# Altium PCB Schematics - Done.PcbDoc
Units mm, origin at the board's own origin, x right, y up, seen from the top; angles counter-clockwise.
Board outline 51 x 43 mm, 2 copper layers (Top Layer, Bottom Layer); 29 components, 26 nets, 122 pads, 23 vias.
Unrouted connection lines stored in the file: 25.
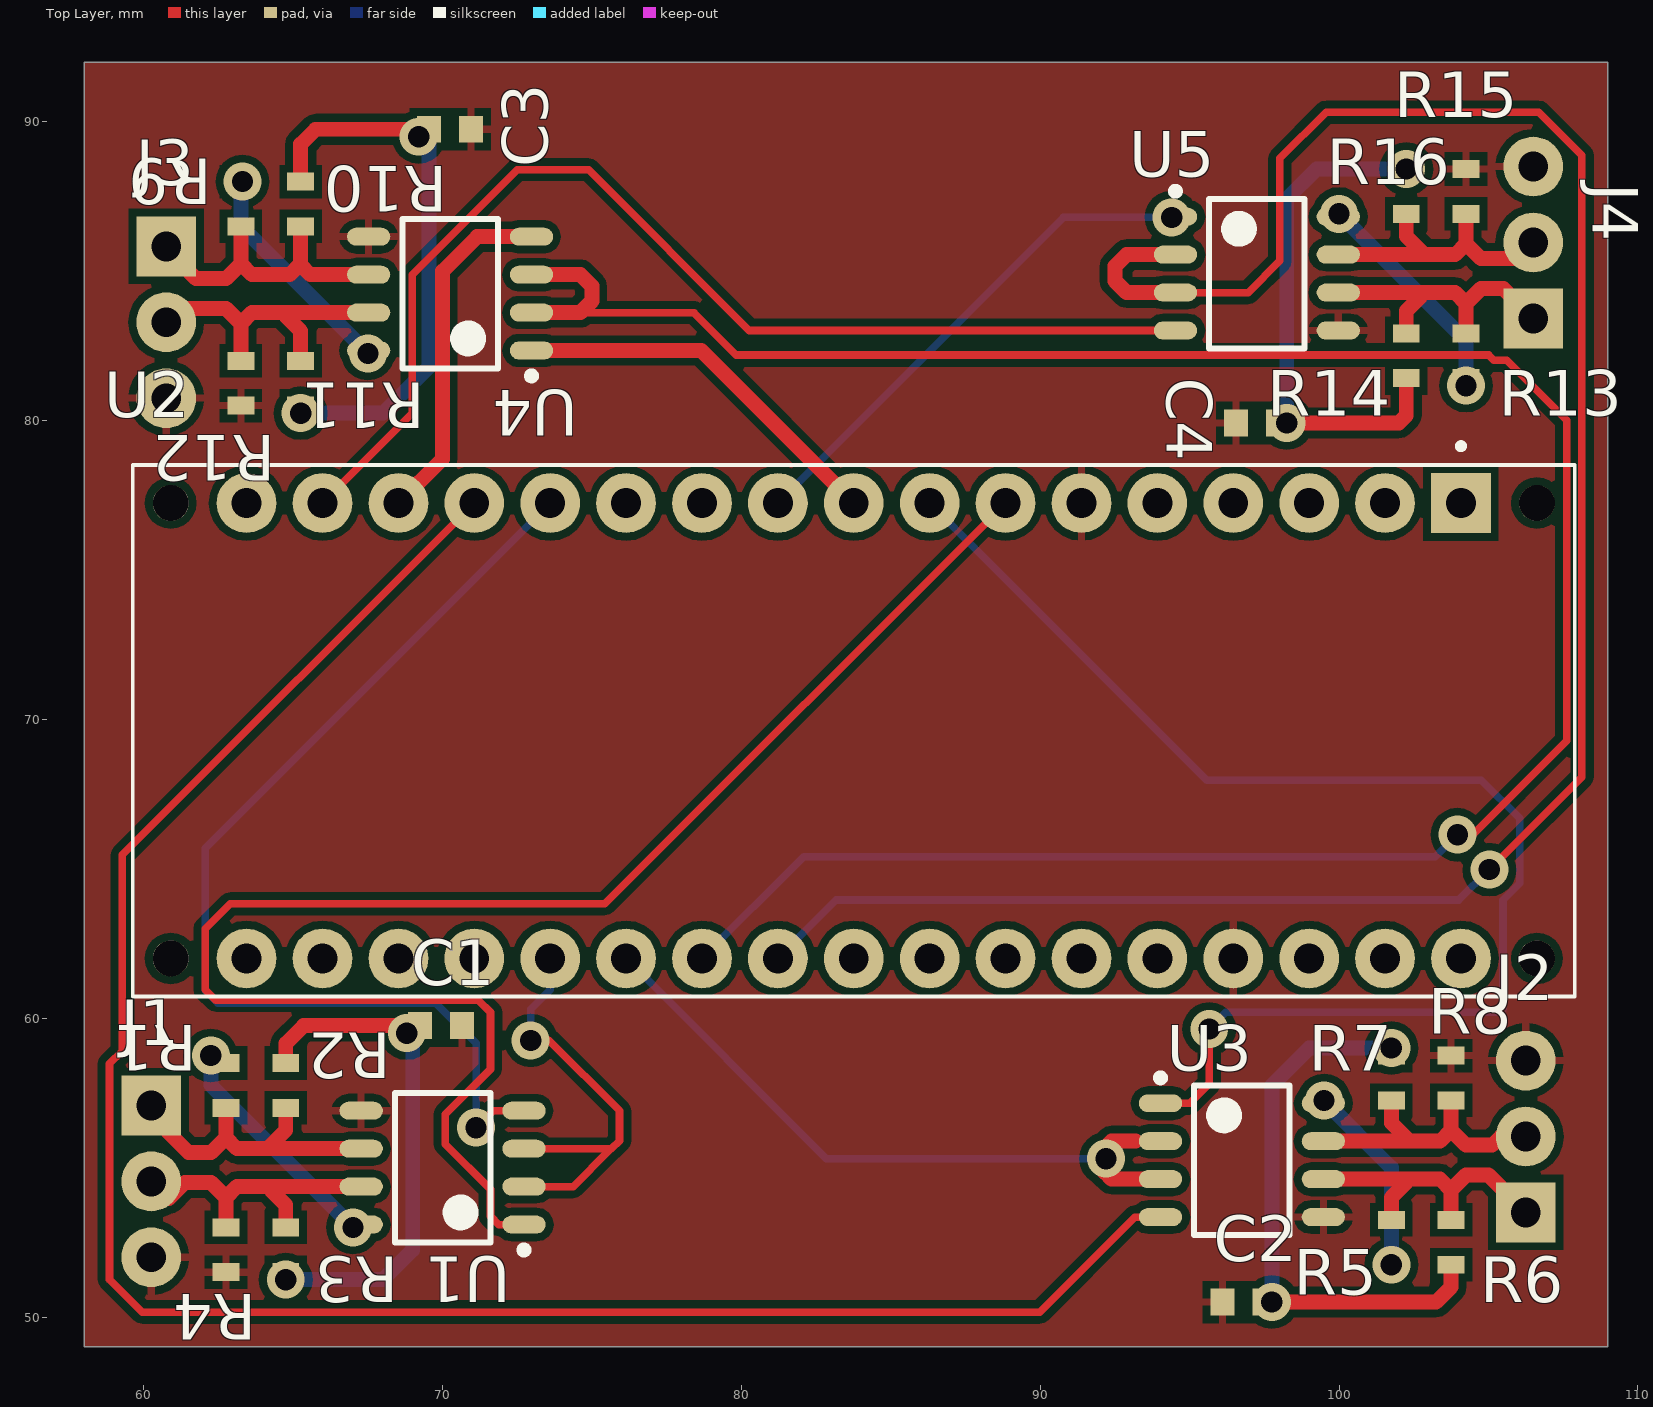
[diagram p0: Top Layer view]
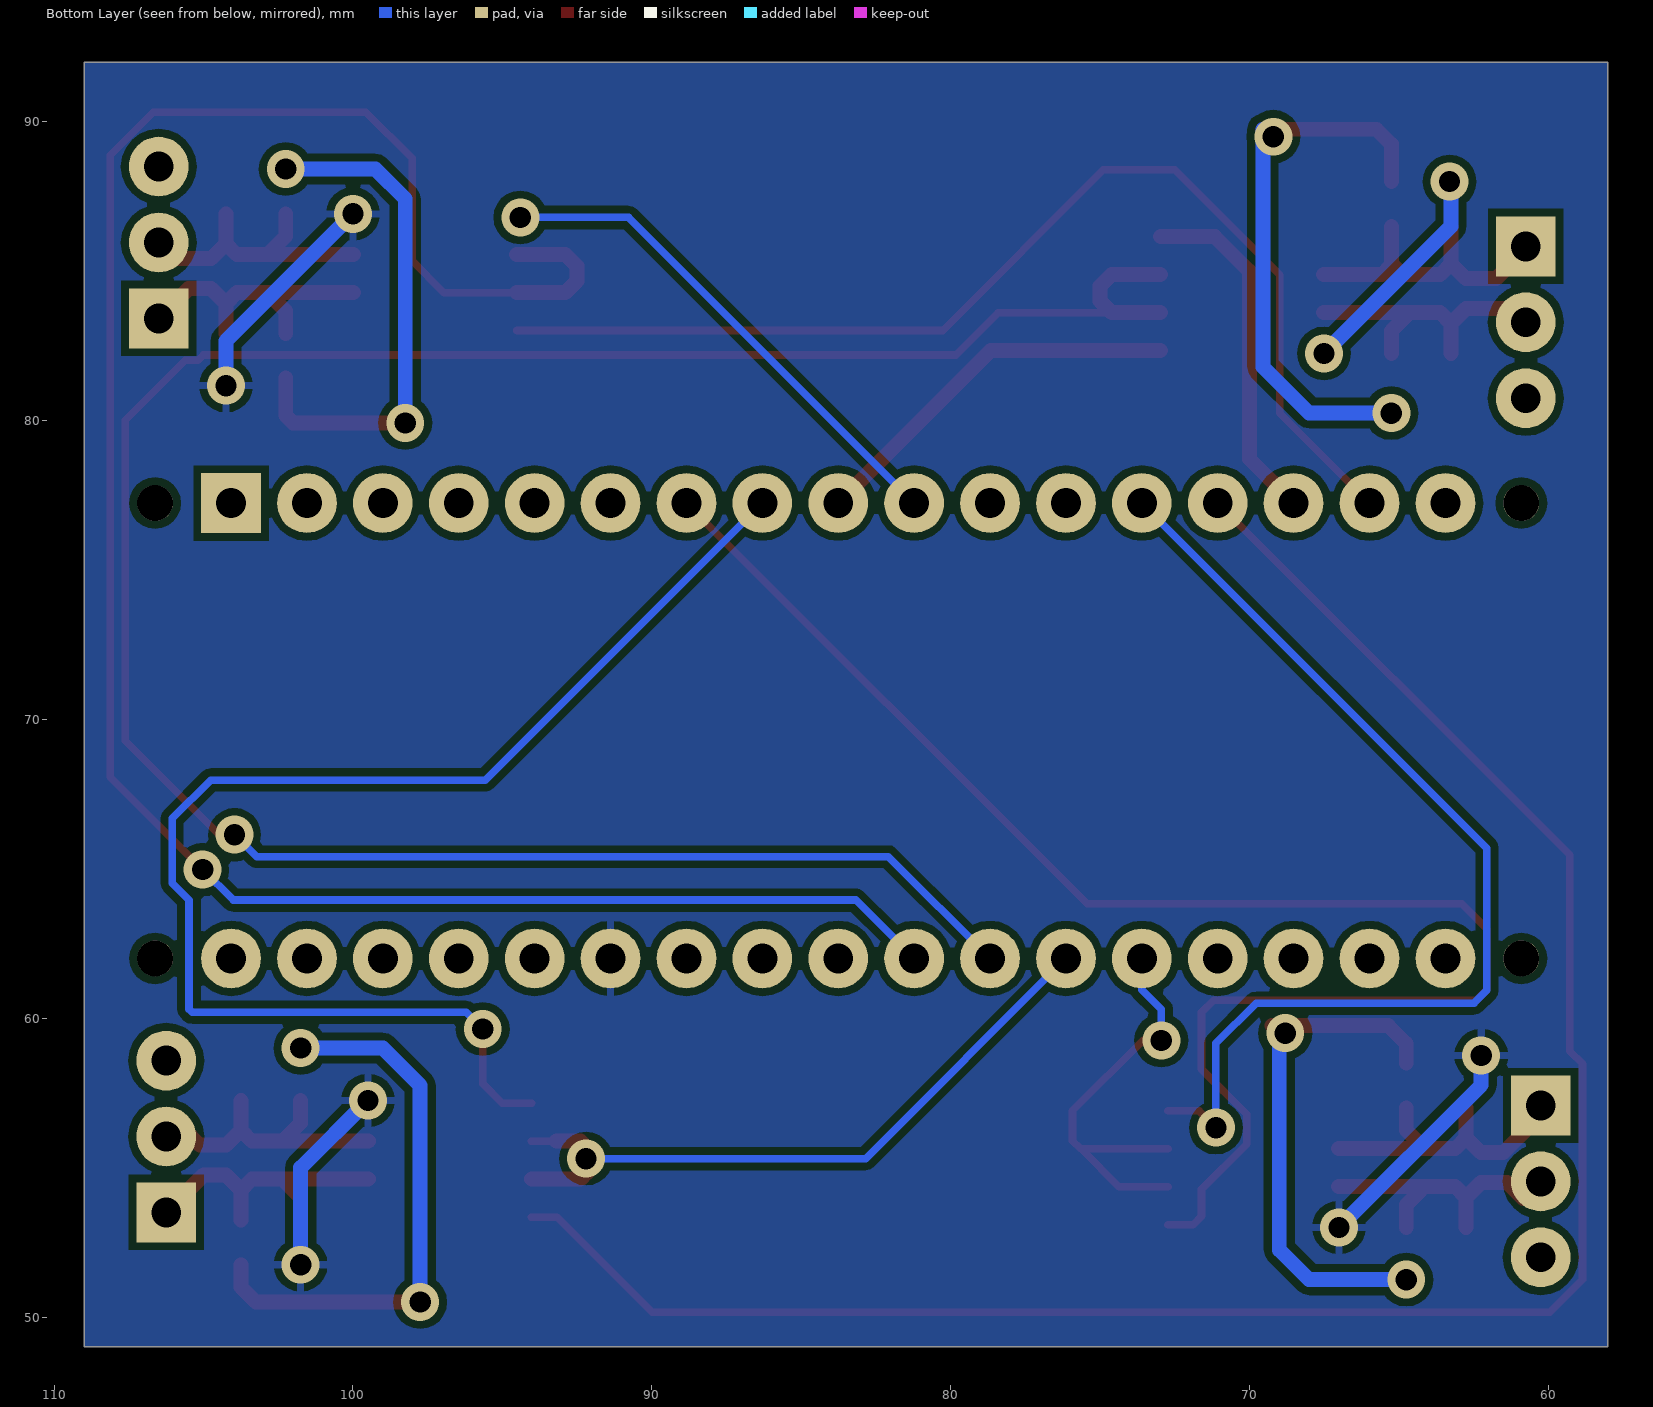
[diagram p1: Bottom Layer view, seen from below]
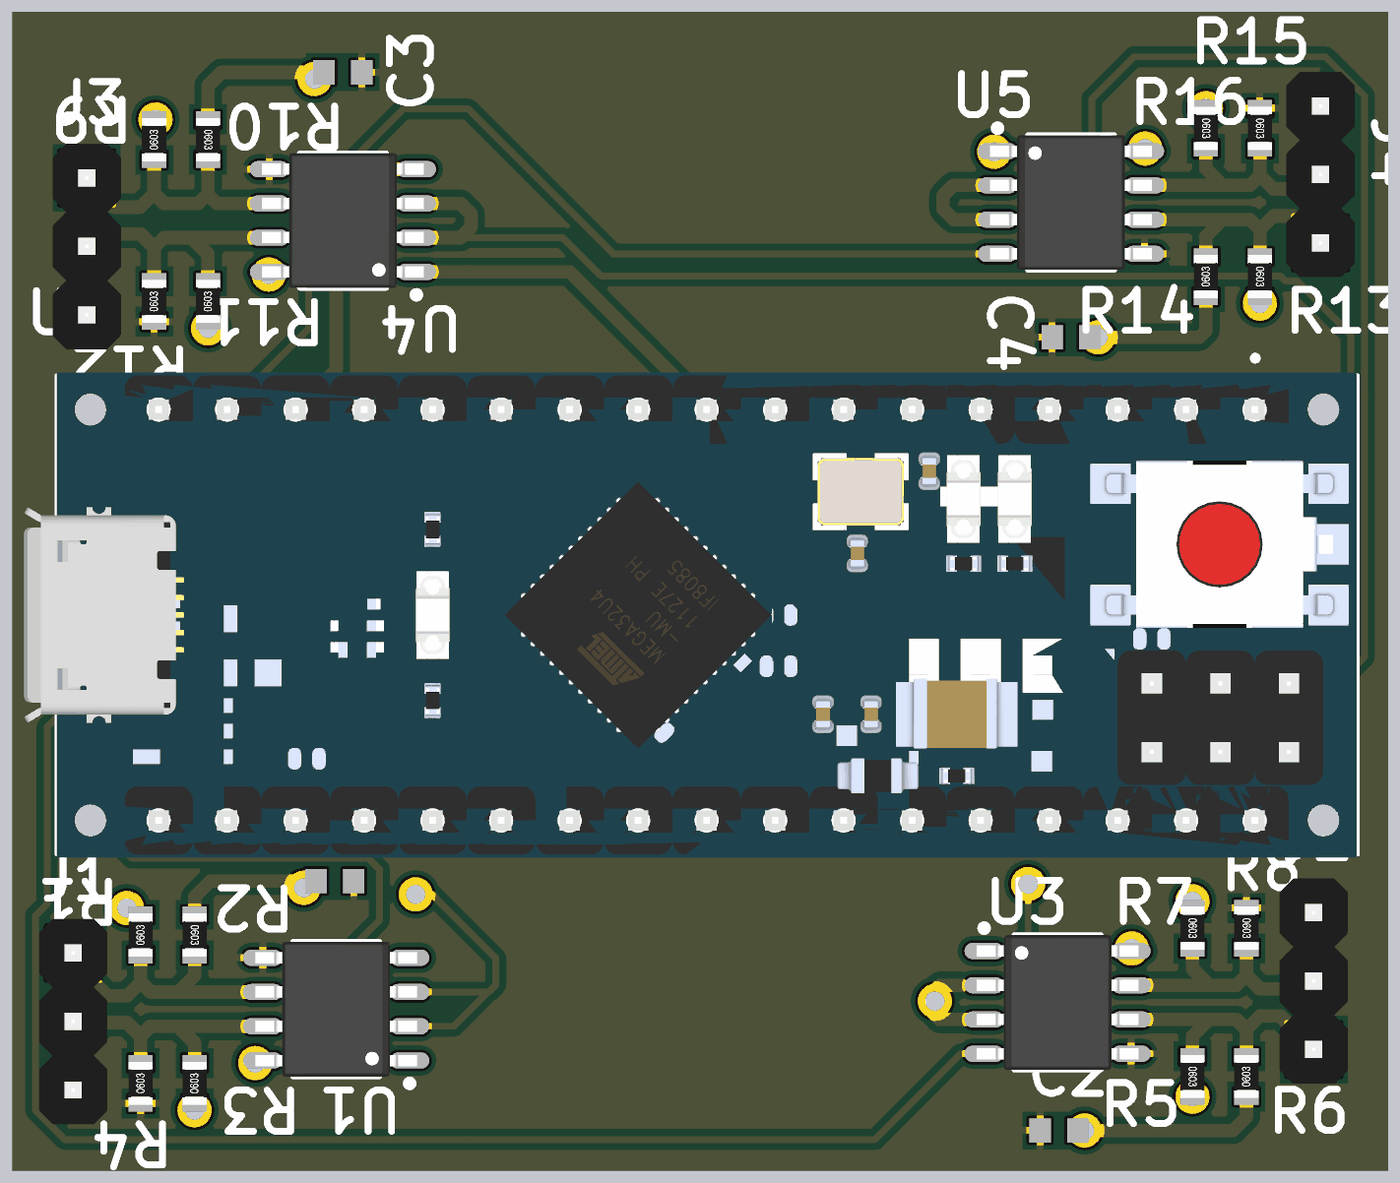
[diagram p2: 3D render of the assembled board from above, using the file's embedded part models]

## Layer stack, top to bottom
Top Solder: solder mask 0.0102, Solder Resist, Dk 3.5
Top Layer: signal copper 0.0356
Dielectric 1: dielectric 0.32, FR-4, Dk 4.8
Bottom Layer: signal copper 0.0356
Bottom Solder: solder mask 0.0102, Solder Resist, Dk 3.5

## Board outline
58,49 109,49 109,92 58,92

## Design rules (kind name [scope] priority, off if disabled: settings)
Clearance [All] p1: gap=0.254 ignorepadtopadclearanceinfootprint=FALSE except(0: Arc-Hole Track-Hole SMDPad-Hole THPad-Hole Via-Hole Fill-Hole Poly-Hole Region-Hole Text-Hole)
PolygonConnect [All] p1: connectstyle=Relief reliefconductorwidth=0.254 reliefentries=4 polygonreliefangle="90 Angle" airgapwidth=0.254
RoutingVias [All] p1: holewidth=0.711 width=1.27 viastyle="Through Hole" minholewidth=0.711 minwidth=1.27 maxholewidth=0.711 maxwidth=1.27
SolderMaskExpansion [All] p1: expansion=0.102 istentingtop=FALSE
Width [All] p1: maxlimit=0.254 minlimit=0.254 preferedwidth=0.254
30 further rules are at their usual default settings.

## Classes and differential pairs
net class "DIFF PAIR DATA": D_N1 D_N2 D_N3 D_N4 D_P1 D_P2 D_P3 D_P4

## Components (designator, comment, footprint, x,y, rotation, side; value= is the part's Value field where it differs from the comment)
C1 "06035C104K4Z2A" 1608[0603] 69.95,59.75 r180 top
C2 "06035C104K4Z2A" 1608[0603] 96.8,50.5 r0 top
C3 "06035C104K4Z2A" 1608[0603] 70.25,89.75 r180 top
C4 "06035C104K4Z2A" 1608[0603] 97.25,79.92 r0 top
J1 "349873-345-34_2" "Header 1x3 male" 60.25,52 r0 top
J2 "349873-345-34_2" "Header 1x3 male" 106.25,58.58 r180 top
J3 "349873-345-34_2" "Header 1x3 male" 60.75,80.75 r0 top
J4 "349873-345-34_2" "Header 1x3 male" 106.5,88.5 r180 top
R1 "CPF-A-0603B100KE1" R0603 62.75,57.75 r90 top value=100K
R2 "CPF-A-0603B100KE1" R0603 64.75,57.75 r270 top value=60R
R3 "CPF-A-0603B100KE1" R0603 64.75,52.25 r90 top value=60R
R4 "CPF-A-0603B100KE1" R0603 62.75,52.25 r90 top value=100K
R5 "CPF-A-0603B100KE1" R0603 101.75,52.5 r270 top value=100K
R6 "CPF-A-0603B100KE1" R0603 103.75,52.5 r90 top value=60R
R7 "CPF-A-0603B100KE1" R0603 101.75,58 r270 top value=60R
R8 "CPF-A-0603B100KE1" R0603 103.75,58 r270 top value=100K
R9 "CPF-A-0603B100KE1" R0603 63.25,87.25 r90 top value=100K
R10 "CPF-A-0603B100KE1" R0603 65.25,87.25 r270 top value=60R
R11 "CPF-A-0603B100KE1" R0603 65.25,81.25 r90 top value=60R
R12 "CPF-A-0603B100KE1" R0603 63.25,81.25 r90 top value=100K
R13 "CPF-A-0603B100KE1" R0603 104.25,82.17 r270 top value=100K
R14 "CPF-A-0603B100KE1" R0603 102.25,82.17 r90 top value=60R
R15 "CPF-A-0603B100KE1" R0603 102.25,87.67 r270 top value=60R
R16 "CPF-A-0603B100KE1" R0603 104.25,87.67 r270 top value=100K
U1 "RS485 tranciever" ST485CDR 70,55 r180 top
U2 "A000053" *ARDUINO_A000053 83.76,69.62 r270 top
U3 "RS485 tranciever" ST485CDR 96.75,55.25 r0 top
U4 "RS485 tranciever" ST485CDR 70.25,84.25 r180 top
U5 "RS485 tranciever" ST485CDR 97.25,84.92 r0 top

## Footprints (in the part's own frame and the unit in brackets; to place one, negate y for a bottom-side part, rotate by r counter-clockwise, add the part's x,y. Pads: shape width x height; smd on the part's side, far side on the other; paste and mask are expansions set on the pad)
1608[0603] [mm] "Chip Capacitor, Body 1.6x0.8mm, IPC High Density"
  rect 0.8x0.9 smd: 1(-0.7,0) 2(0.7,0)
  body extent -0.87,-0.48 0.87,0.48, height 1.3
*ARDUINO_A000053 [mm]
  rect 2x2 hole 1: 1(-7.62,20.32)
  round 2 hole 1: 2(-7.62,17.78) 3(-7.62,15.24) 4(-7.62,12.7) 5(-7.62,10.16) 6(-7.62,7.62) 7(-7.62,5.08) 8(-7.62,2.54) 9(-7.62,0) 10(-7.62,-2.54) 11(-7.62,-5.08) 12(-7.62,-7.62) 13(-7.62,-10.16) 14(-7.62,-12.7) 15(-7.62,-15.24) 16(-7.62,-17.78) 17(-7.62,-20.32) 18(7.62,-20.32) 19(7.62,-17.78) 20(7.62,-15.24) 21(7.62,-12.7) 22(7.62,-10.16) 23(7.62,-7.62) 24(7.62,-5.08) 25(7.62,-2.54) 26(7.62,0) 27(7.62,2.54) 28(7.62,5.08) 29(7.62,7.62) 30(7.62,10.16) 31(7.62,12.7) 32(7.62,15.24) 33(7.62,17.78) 34(7.62,20.32)
  round 1.2 hole 1.2 unplated: None(-7.62,22.86) None(-7.62,-22.86) None(7.62,22.86) None(7.62,-22.86)
  silkscreen extent -9.62,-24.13 8.89,24.13, body extent -9,-25.33 9,24.08, height 13.1
"Header 1x3 male" [mm]
  rect 2x2 hole 1: 1(0,5.08)
  round 2 hole 1: 2(0,2.54) 3(0,0)
  body extent -1.27,-1.27 1.27,6.35, height 8.89
R0603 [mm]
  rect 0.6x0.9 smd: 1(-0.75,0) 2(0.75,0)
  body extent -0.8,-0.45 0.8,0.45, height 0.5
ST485CDR [mm] "SOIC, 8-Leads, Body 4.90x3.90mm, Pitch 1.27mm, IPC Medium Density"
  oval 1.45x0.6 smd: 1(-2.725,1.905) 2(-2.725,0.635) 3(-2.725,-0.635) 4(-2.725,-1.905) 5(2.725,-1.905) 6(2.725,-0.635) 7(2.725,0.635) 8(2.725,1.905)
  silkscreen extent -2.85,-2.5 1.6,2.88, body extent -3,-2.5 3,2.5, height 1.75

## Part data
C1 C2 C3 C4: "0.1ÂµF Â±10% 50V Ceramic Capacitor X7R 0603 _1608 Metric_", Package="1608 AVX", Digi-Key_Part_Number=478-6344-1-ND, MF=AVX, MP=06035C104K4Z2A, SnapEDA_Link=https://www.snapeda.com/parts/06035C104K4Z2A/AVX/view-part/572777/?ref=snap
J1 J2 J3 J4: "Header 1x3 male 2.54mm"
R1 R2 R3 R4 R5 R6 R7 R8 R9 R10 R11 R12 R13 R14 R15 R16: "R0603"
U1 U3 U4 U5: library part ST485CDR, "RS485 tranciever single", Supplier Part Number 1=1564307, Supplier 1=Farnell
U2: "MCU, ARDUINO MICRO, LEONARDO BASED, ATMEGA32u4, 5V, USB-MICRO", Package=None, Availability=Unavailable, MF=Arduino, MP=A000053, Price=None, SnapEDA_Link=https://www.snapeda.com/parts/A000053/Arduino/view-part/?ref=snap

## Via types
v1: diameter 1.27, hole 0.711, Top Layer to Bottom Layer, 23 vias

## Nets (pads, with @x,y where several pads share a name; then routed paths per layer and width w, separated by ;. In a path a pad name is that pad's centre, name@x,y a point inside that pad or via, vN(x,y) a via of type N, cw(c..) or ccw(c..) an arc to the next point about the centre after c; other vN are vias at no path point)
+5V: R1.2 R5.2 R9.2 R13.2 U1.8 U2.29 U3.8 U4.8 U5.8 | length 21.7
  Bottom Layer w0.5: v1(62.242,58.75) 62.242,57.758 v1(67,53) ; v1(99.5,57.25) 101.75,55 v1(101.75,51.75) ; v1(100,86.92) 104.25,82.67 v1(104.25,81.17)
  other v1: 67.5,82.25 63.3,88
D_N1: J1.2 R3.2 R4.2 U1.7 | length 9.6
  Top Layer w0.5: J1.2@60.5,53.96 60.835,53.96 61.375,54.5 62.25,54.5 62.75,54 ; R4.2 62.75,54 ; 64.25,54.25 64.75,53.75 R3.2 ; U1.7@67.025,54.365 63.115,54.365 62.75,54
D_N2: J2.2 R7.2 R8.2 U3.7 | length 9.6
  Top Layer w0.5: U3.7 103.385,55.885 103.75,56.25 ; R7.2 101.75,56.5 102.25,56 ; R8.2 103.75,56.25 ; J2.2@106,56.29 105.665,56.29 105.125,55.75 104.25,55.75 103.75,56.25
D_N3: J3.2 R11.2 R12.2 U4.7 | length 9.3
  Top Layer w0.5: J3.2@61,83.75 62.75,83.75 63.25,83.25 ; R12.2@63.25,82.25 63.25,83.25 ; 64.75,83.5 65.25,83 R11.2@65.25,82.25 ; U4.7 63.615,83.615 63.25,83.25
D_N4: J4.2 R15.2 R16.2 U5.7
D_P1: J1.1 R1.1 R2.2 U1.6
D_P2: J2.1 R5.1 R6.2 U3.6
D_P3: J3.1 R9.1 R10.2 U4.6 | length 2
  Top Layer w0.5: 62,84.75 62.75,84.75 63.25,85.25 63.615,84.885
D_P4: J4.1 R13.1 R14.2 U5.6 | length 9.8
  Top Layer w0.5: U5.6 103.885,84.285 104.25,83.92 ; R14.2 102.25,83.67 102.75,84.17 ; R13.1 104.25,83.92 ; J4.1 105.5,84.42 104.75,84.42 104.25,83.92
GND: C1.1 C2.1 C3.1 C4.1 J1.3 J2.3 J3.3 J4.3 R4.1 R8.1 R12.1 R16.1 U1.5 U2.6 U2.31 U3.5 U4.5 U5.5
NetC1_2: C1.2 R2.1 R3.1
  other v1: 64.75,51.25 68.8,59.5
NetC2_2: C2.2 R6.1 R7.1
  other v1: 97.75,50.5 101.75,59
NetC3_2: C3.2 R10.1 R11.1
  other v1: 65.25,80.25 69.2,89.5
NetC4_2: C4.2 R14.1 R15.1
  other v1: 98.25,79.92 102.25,88.42
NetU1_1: U1.1 U2.7 | length 53.9
  Top Layer w0.254: U1.1 71.882,53.095 71.603,53.374 71.603,54.28 70.095,55.787 70.095,56.79 71.603,58.297 71.603,60.198 71.196,60.604 62.408,60.604 62.052,60.96 62.052,62.992 62.89,63.83 75.43,63.83 U2.7
NetU1_2: U1.2 U1.3 U2.22 | length 14.7
  Top Layer w0.254: U1.2 74.365,54.365 75.565,55.565 75.565,55.635 ; U1.3 75.65,55.635 75.921,55.905 75.921,56.896 73.558,59.258 v1(72.949,59.258)
  Bottom Layer w0.254: v1(72.949,59.258) 72.949,60.3 73.6,60.951 U2.22
NetU1_4: U1.4 U2.13 | length 35.6
  Top Layer w0.254: v1(71.12,56.337) 71.688,56.905 U1.4
  Bottom Layer w0.254: v1(71.12,56.337) 71.12,59.157 69.774,60.503 62.484,60.503 62.052,60.935 62.052,65.692 U2.13
NetU2_8: U2.8 U3.1 | length 44.6
  Top Layer w0.254: U3.1 94.996,57.155 95.656,57.815 v1(95.656,59.639)
  Bottom Layer w0.254: U2.8 95.57,67.97 104.762,67.97 106.045,66.687 106.045,64.511 105.486,63.951 105.486,60.3 105.385,60.198 96.215,60.198 v1(95.656,59.639)
NetU2_9: U2.9 U4.1 | length 2.2
  Top Layer w0.5: U4.1 75.155,82.345
NetU2_10: U2.10 U5.1 | length 17.3
  Top Layer w0.254: v1(94.4,86.8) 94.5,86.8 U5.1
  Bottom Layer w0.254: U2.10 90.78,86.8 v1(94.4,86.8)
NetU2_14: U2.14 U3.4 | length 68
  Top Layer w0.254: U2.14 59.284,65.464 59.284,58.903 58.852,58.471 58.852,51.257 59.944,50.165 89.987,50.165 93.167,53.345 U3.4
NetU2_15: U2.15 U4.4
NetU2_16: U2.16 U5.4 | length 38.1
  Top Layer w0.254: U2.16 68.986,80.246 68.986,84.879 72.5,88.392 74.887,88.392 80.264,83.015 U5.4
NetU2_23: U2.23 U3.2 U3.3 | length 24.5
  Top Layer w0.254: v1(92.2,55.3) 92.785,55.885 ; 93.198,55.885 U3.2
  Top Layer w0.5: 93.198,55.885 92.785,55.885 92.385,55.885 92,55.5 92,55.3 92,55 92.156,54.844 92.385,54.615 U3.3
  Bottom Layer w0.254: U2.23 82.84,55.3 v1(92.2,55.3)
NetU2_24: U2.24 U4.2 U4.3 | length 82
  Top Layer w0.254: 74.615,83.615 78.412,83.615 79.832,82.194 105.004,82.194 105.181,82.017 105.613,82.017 107.62,80.01 107.62,69.291 104.47,66.142 v1(103.962,66.142)
  Top Layer w0.5: U4.2 74.615,83.615 75,84 75,84.5 74.615,84.885 U4.3
  Bottom Layer w0.254: U2.24 82.085,65.405 103.226,65.405 v1(103.962,66.142)
NetU2_25: U2.25 U5.2 U5.3 | length 73.8
  Top Layer w0.254: U5.3 96.96,84.285 98.019,85.344 98.019,88.773 99.568,90.322 106.68,90.322 108.128,88.875 108.128,68.072 v1(105.029,64.973)
  Top Layer w0.5: U5.3 92.885,84.285 92.5,84.67 92.5,85.17 92.885,85.555 U5.2
  Bottom Layer w0.254: U2.25 83.177,63.957 104.013,63.957 v1(105.029,64.973)
pads on no net: U2.1 U2.2 U2.3 U2.4 U2.5 U2.11 U2.12 U2.17 U2.18 U2.19 U2.20 U2.21 U2.26 U2.27 U2.28 U2.30 U2.32 U2.33 U2.34 U2.None
copper on no net: | length 141.5
  Top Layer w0.5: 60.5,56.5 61.5,55.5 62.25,55.5 62.75,56 ; 60.5,86 61.75,84.75 62,84.75 ; 62.75,57 62.75,56 ; 63.25,85.25 63.25,86.5 ; 63.615,84.885 64.885,84.885 ; 64.25,55.75 64.75,56.25 64.75,57 ; 64.75,58.5 64.75,59.15 65.35,59.75 69.25,59.75 ; 64.9,84.9 65.205,85.205 65.25,85.205 ; 65.25,86.5 65.25,85.205 ; 65.25,88 65.25,89.25 65.75,89.75 69.55,89.75 ; 67.025,55.635 63.115,55.635 62.75,56 ; 67.525,84.885 65.57,84.885 65.25,85.205 ; 68.52,77.24 70,78.72 70,85 71.155,86.155 72.975,86.155 ; 75.155,82.345 78.655,82.345 83.76,77.24 ; 97.75,50.5 102.75,50.5 103.25,50.5 103.75,51 103.75,51.75 ; 97.95,79.92 102,79.92 102.25,80.17 102.25,81.42 ; 99.475,54.615 103.385,54.615 103.75,54.25 ; 99.975,85.555 103.885,85.555 104.25,85.92 ; 101.75,53.25 101.75,54 102.25,54.5 ; 102.25,86.92 102.25,86.17 102.75,85.67 ; 103.75,53.25 103.75,54.25 ; 104.25,86.92 104.25,85.92 ; 105.625,85.42 106.165,85.96 106.5,85.96 ; 106,53.75 105,54.75 104.25,54.75 103.75,54.25 ; 106.5,85.42 104.75,85.42 104.25,85.92
  Bottom Layer w0.5: 63.25,88.25 63.25,86.5 67.5,82.25 ; 64.75,51.25 68,51.25 69,52.25 69,59.75 ; 65.25,80.25 68,80.25 69.55,81.8 69.55,89.75 ; 97.75,50.5 97.75,57.75 99,59 101.75,59 ; 98.25,79.92 98.25,87.42 99.25,88.42 102.25,88.42

## Polygon pours and split planes (outlines as drawn)
GND on Top Layer "GND" (solid, pour order 0): 58,49 109,49 109,92 58,92
+5V on Bottom Layer "PWR" (solid, pour order 1): 58,49 109,49 109,92 58,92